# EAGLE board client (EAGLE 9.0.1)
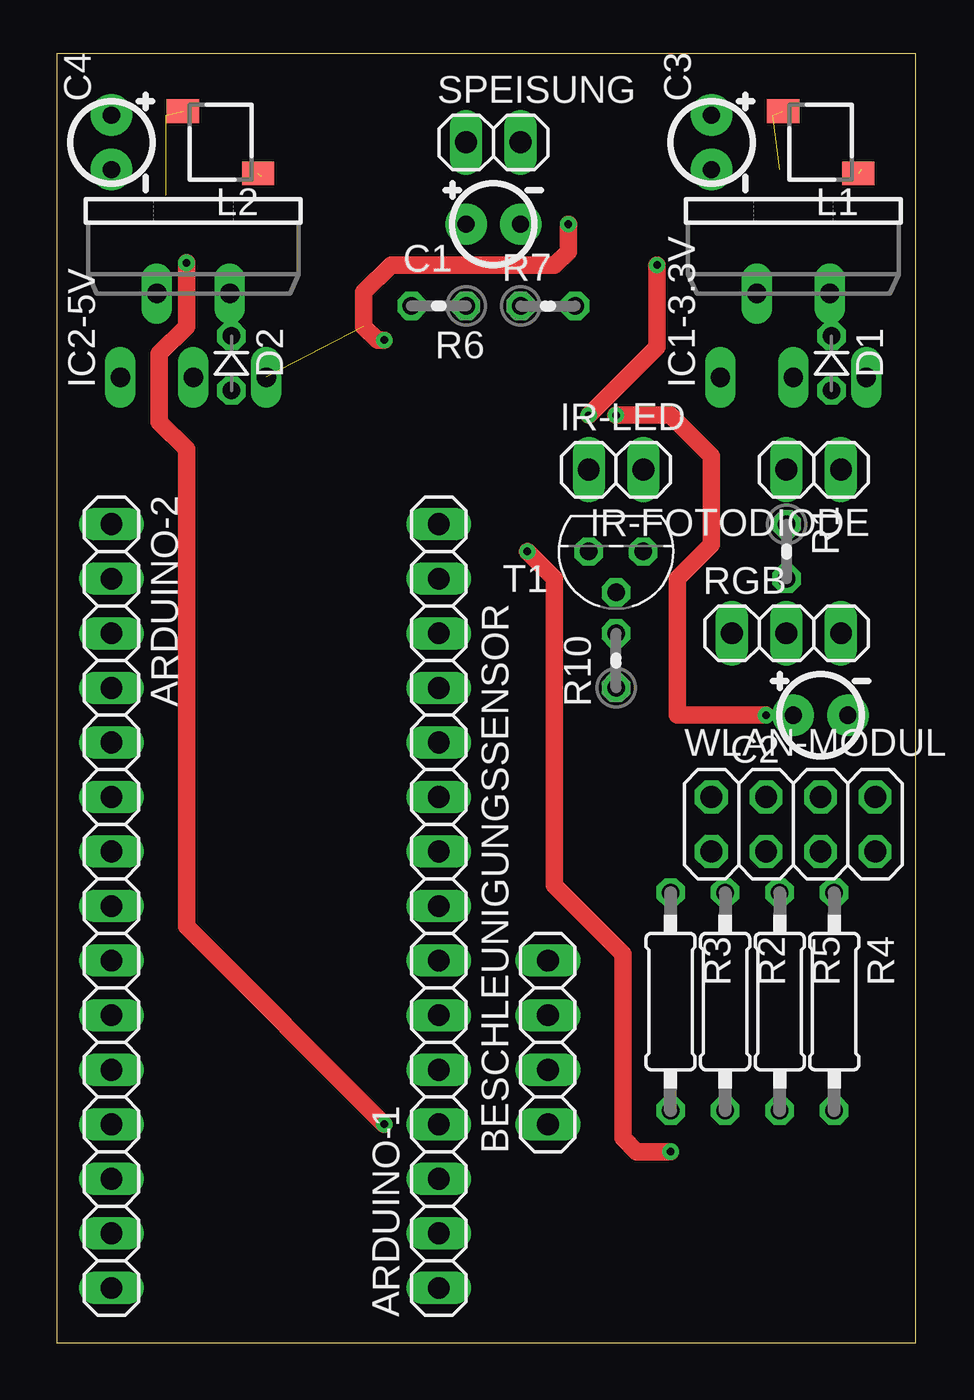
[diagram p0: board, top side]
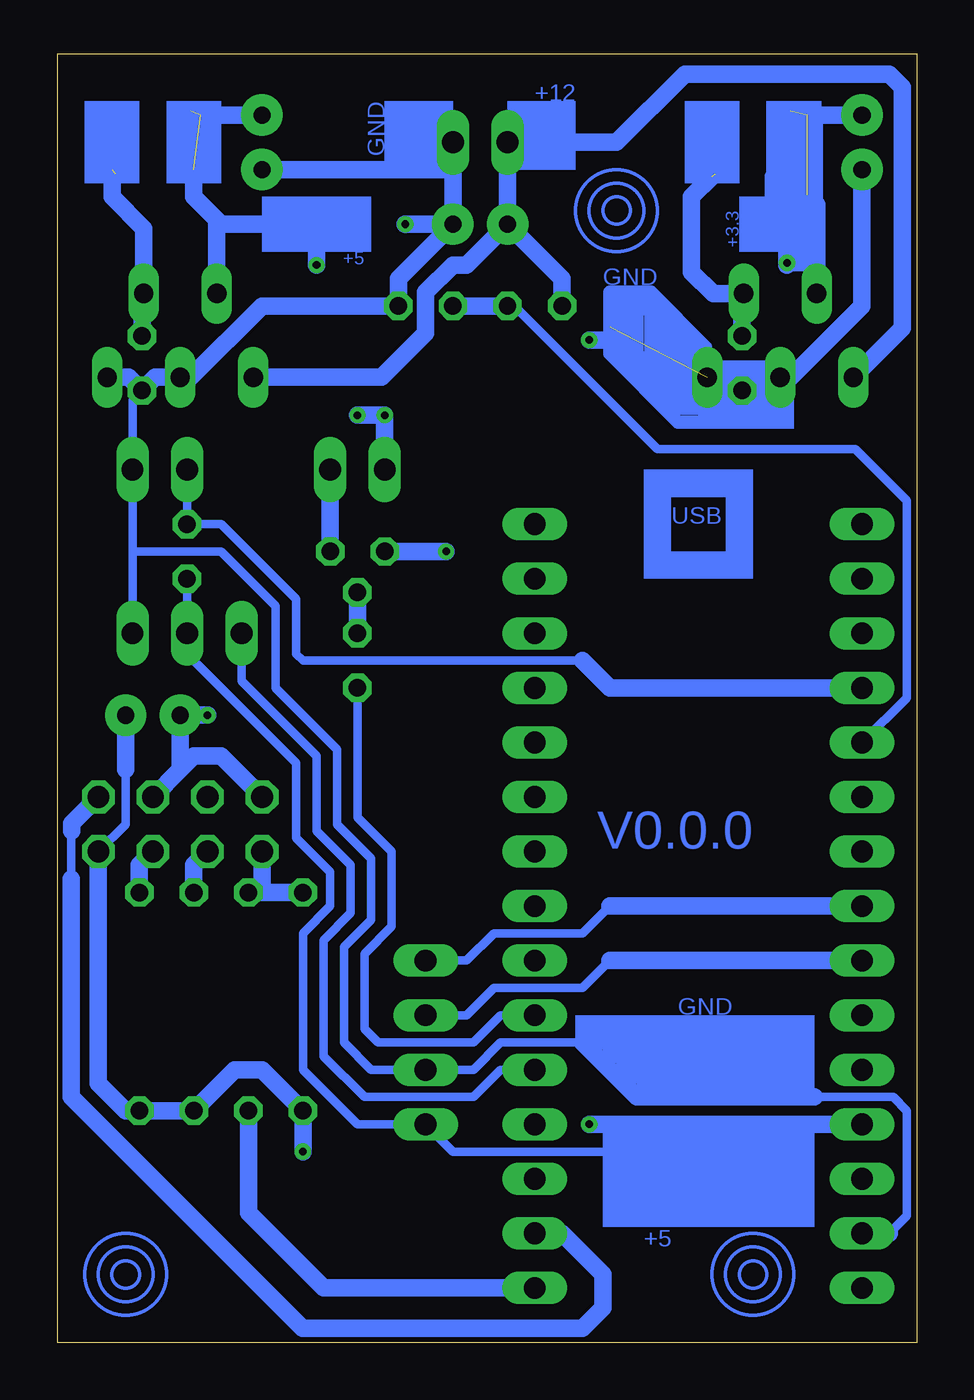
[diagram p1: board, bottom side, seen from below]

Size 40 x 60.01 mm. Coordinates in mm from the lower left corner, seen from the top.
Outline: 0,60 40,60 40,0 0,0 0,60.01
Copper layers (1*16): Top 0.035mm / dielectric 1.5mm / Bottom 0.035mm
Design rules "default *": minimum track width 6mil, minimum drill 0.35mm, track to track 6mil, track to pad 6mil, pad to pad 6mil, via to via 6mil, smd to smd 6mil, copper to edge 10mil, drill to drill 6mil, minimum pad ring 10mil, minimum via ring 8mil, stop-mask expansion 4mil, vias tented up to drill 0mil, thermal gap 10mil

## Footprints (pad centres in the part's own frame; a part is rotated, then mirrored left to right if it is on the bottom)
1X15 = drill 1.016 long: 1 -17.78,0; 2 -15.24,0; 3 -12.7,0; 4 -10.16,0; 5 -7.62,0; 6 -5.08,0; 7 -2.54,0; 8 0,0; 9 2.54,0; 10 5.08,0; 11 7.62,0; 12 10.16,0; 13 12.7,0; 14 15.24,0; 15 17.78,0
1X04 = drill 1.016 long: 1 -3.81,0; 2 -1.27,0; 3 1.27,0; 4 3.81,0
KONDENSATOR_ELEKTROLYT = drill 0.8 pad 1.93: P$1 -1.27,0; P$2 1.27,0
D-2.5 = drill 0.813 octagon: A 1.27,0; C -1.27,0
TO220-51 = drill 0.9 long: 1 -3.4,-8.4; 2 -1.7,-4.5; 3 0,-8.4; 4 1.7,-4.5; 5 3.4,-8.4
1X02 = drill 1.016 long: 1 -1.27,0; 2 1.27,0
SM-L15A = smd 1.1 x 1.5: 1 -1.45,-1.75; 2 1.45,1.75
0204V = drill 0.813 octagon: 1 -1.27,0; 2 1.27,0
0207/10 = drill 0.813 octagon: 1 -5.08,0; 2 5.08,0
1X03 = drill 1.016 long: 1 -2.54,0; 2 0,0; 3 2.54,0
TO92 = drill 0.813 octagon: 1 1.27,0; 2 0,1.905; 3 -1.27,0
2X04 = drill 1.016 octagon: 1 -3.81,-1.27; 2 -3.81,1.27; 3 -1.27,-1.27; 4 -1.27,1.27; 5 1.27,-1.27; 6 1.27,1.27; 7 3.81,-1.27; 8 3.81,1.27

## Placement (x,y rotation side)
ARDUINO-1  [1X15]  17.78,20.32 90 top
ARDUINO-2  [1X15]  2.54,20.32 270 top
BESCHLEUNIGUNGSSENSOR  [1X04]  22.86,13.97 90 top
C1  100µF  [KONDENSATOR_ELEKTROLYT]  20.32,52.07 180 top
C2  10µF  [KONDENSATOR_ELEKTROLYT]  35.56,29.21 180 top
C3  100µF  [KONDENSATOR_ELEKTROLYT]  30.48,55.88 90 top
C4  100µF  [KONDENSATOR_ELEKTROLYT]  2.54,55.88 90 top
D1  [D-2.5]  36.07,45.59 270 top
D2  [D-2.5]  8.13,45.59 270 top
IC1-3.3V  [TO220-51]  34.29,53.34 0 top
IC2-5V  [TO220-51]  6.35,53.34 0 top
IR-FOTODIODE  [1X02]  35.24,40.64 180 top
IR-LED  [1X02]  26.04,40.64 0 top
L1  100µH  [SM-L15A]  35.56,55.88 90 top
L2  100µH  [SM-L15A]  7.62,55.88 90 top
R1  200k  [0204V]  33.97,36.83 270 top
R2  1.8k  [0207/10]  31.11,15.88 270 top
R3  3.3k  [0207/10]  28.57,15.88 270 top
R4  100k  [0207/10]  36.2,15.88 270 top
R5  100k  [0207/10]  33.66,15.88 270 top
R6  680k  [0204V]  17.78,48.26 180 top
R7  470k  [0204V]  22.86,48.26 0 top
R10  5.1k  [0204V]  26.04,31.75 90 top
RGB  [1X03]  33.97,33.02 0 top
SPEISUNG  [1X02]  20.32,55.88 0 top
T1  BC337  [TO92]  26.04,36.83 180 top
WLAN-MODUL  [2X04]  34.29,24.13 0 top

## Library data of the parts
ARDUINO-1 ARDUINO-2 BESCHLEUNIGUNGSSENSOR IR-FOTODIODE IR-LED RGB SPEISUNG WLAN-MODUL = pinhead
C1-C4 = 0_TEC-1.IPA Sven
D1 D2 = diode
IC1-3.3V IC2-5V = linear
L1 L2 = inductor-neosid; OC_FARNELL: unknown; OC_NEWARK: unknown
R1 R6 R7 = rcl; SPICEPREFIX: R
R2-R5 = rcl
R10 = resistor
T1 = transistor

## Nets
N$1: D1.C IC1-3.3V.4 L1.1
N$3: C1.P$2 IC1-3.3V.1 IC2-5V.1 R6.2 SPEISUNG.1
N$4: ARDUINO-2.14 BESCHLEUNIGUNGSSENSOR.2 C1.P$1 C3.P$1 C4.P$1 D1.A D2.A IC1-3.3V.3 IC1-3.3V.5 IC2-5V.3 IC2-5V.5 IR-FOTODIODE.1 R7.2 RGB.3 SPEISUNG.2
N$5: D2.C IC2-5V.4 L2.1
N$7: ARDUINO-2.5 R6.1 R7.1
N$8: C2.P$2 C3.P$2 IC1-3.3V.2 IR-LED.1 L1.2 WLAN-MODUL.2 WLAN-MODUL.6
N$10: C2.P$1 R3.2 R4.2 R5.2 T1.1 WLAN-MODUL.7
N$11: R2.1 R3.1 WLAN-MODUL.1
N$12: R5.1 WLAN-MODUL.3
N$13: R4.1 WLAN-MODUL.5
N$14: ARDUINO-1.1 R2.2
N$15: ARDUINO-1.2 WLAN-MODUL.8
N$16: IR-LED.2 T1.3
N$17: ARDUINO-1.5 RGB.1
N$18: R10.2 T1.2
N$19: ARDUINO-1.6 R10.1
N$20: ARDUINO-2.9 BESCHLEUNIGUNGSSENSOR.3
N$21: ARDUINO-2.8 BESCHLEUNIGUNGSSENSOR.4
N$22: ARDUINO-2.4 IR-FOTODIODE.2 R1.1
N$23: ARDUINO-2.12 BESCHLEUNIGUNGSSENSOR.1 C4.P$2 IC2-5V.2 L2.2 R1.2 RGB.2

## Tracks (layer width: path | path; a pad name or v marks a point on that pad's centre or on a via)
N$1  (1 unrouted)
  Bottom 0.813: 37.47,54.61 37.47,53.34 35.99,51.87 IC1-3.3V.4 36.07,48.76 D1.C
N$3
  Bottom 0.813: C1.P$2 SPEISUNG.1 13.97,55.88 10.79,59.05 1.27,59.05 0.66,58.45 0.66,47.23 IC2-5V.1 | R6.2 16.51,49.53 C1.P$2 | IC1-3.3V.1 24.91,44.94 22.86,46.99 22.86,48.9 21.59,50.16 20.95,50.16 C1.P$2
N$4  (via drill 0.35)  (1 unrouted)
  Top 0.813: v23.81,52.07 23.81,50.8 23.18,50.16 15.56,50.16 14.29,48.9 14.29,47.31 14.92,46.67 v15.24,46.67
  Bottom 0.406: 1.27,5.08 0.46,5.89 0.46,10.79 1.09,11.43 4.76,11.43 | D1.A 36.51,43.88 IR-FOTODIODE.1 36.51,36.83 | RGB.3 36.51,36.83 | 36.51,36.83 32.38,36.83 29.84,34.29 29.84,30.48 26.99,27.62 26.99,24.13 25.4,22.54 25.4,19.68 26.67,18.41 26.67,13.97 25.4,12.7 BESCHLEUNIGUNGSSENSOR.2 20.64,12.7 19.37,13.97 15.56,13.97
  Bottom 0.813: SPEISUNG.2 21.59,54.61 | 21.59,54.61 C1.P$1 | C1.P$1 24.13,49.53 R7.2 30.48,48.26 33.8,44.94 IC1-3.3V.3 35.45,44.94 D1.A 36.69,44.94 IC1-3.3V.5 | C3.P$1 21.59,54.61 | C4.P$1 2.54,48.26 5.86,44.94 IC2-5V.3 7.51,44.94 D2.A 8.74,44.94 IC2-5V.5 | ARDUINO-2.14 1.27,5.08 | 4.76,11.43 13.02,11.43 15.56,13.97 | C1.P$1 v23.81,52.07 | v15.24,46.67 13.97,46.67
N$5  (1 unrouted)
  Bottom 0.813: D2.C 8.13,48.76 IC2-5V.4 9.47,48.84 10.48,49.85 10.48,53.34 9.53,54.29
N$6
  Bottom 0.635: 9.84,42.86 11.11,42.86 14.29,46.04 14.29,48.9 12.38,48.9 9.84,46.35 9.84,43.5 11.11,43.5 13.65,46.04 13.65,48.58 12.38,48.58 10.16,46.35 10.16,43.81 10.79,43.81 13.02,46.04 13.02,48.26 12.7,48.26 12.38,47.94 | 12.38,47.94 10.79,46.35 10.79,44.45 | 10.79,44.13 10.79,44.45 | 10.79,44.45 12.38,46.04 12.38,46.67 | 12.38,47.94 12.38,46.67 | 12.38,46.67 11.11,45.4 11.11,46.04 12.06,46.99
N$7
  Bottom 0.406: ARDUINO-2.5 0.46,30.02 0.46,39.2 2.86,41.59 12.06,41.59 18.73,48.26 R6.1
  Bottom 0.813: R7.1 R6.1
N$8  (via drill 0.35)  (2 unrouted)
  Top 0.813: v27.94,50.16 27.94,46.35 v24.77,43.18 | v33.02,29.21 28.89,29.21 28.89,35.56 30.48,37.15 30.48,41.27 28.57,43.18 v26.04,43.18
  Bottom 0.813: WLAN-MODUL.2 32.38,27.3 33.66,27.3 34.29,26.67 | 34.29,26.67 WLAN-MODUL.6 | 34.29,26.67 C2.P$2 v33.02,29.21 | IC1-3.3V.2 32.59,52.27 | 32.59,52.27 33.66,53.34 33.66,54.61 | 32.59,52.27 32.38,52.07 27.94,52.07 v27.94,50.16 | C3.P$2 33.34,57.15 | IR-LED.1 v24.77,43.18 v26.04,43.18
N$9
  Bottom 0.813: 5.08,53.34 5.08,54.61
N$10  (via drill 0.35)
  Top 0.813: v28.57,8.89 26.99,8.89 26.35,9.53 26.35,18.1 23.18,21.27 23.18,35.56 v21.91,36.83
  Bottom 0.406: WLAN-MODUL.7 36.83,24.13 36.83,26.67
  Bottom 0.813: WLAN-MODUL.7 38.1,12.06 36.83,10.79 R4.2 R5.2 31.75,12.7 30.48,12.7 R3.2 v28.57,8.89 | 36.83,26.67 C2.P$1 | v21.91,36.83 T1.1
N$11
  Bottom 0.813: R2.1 30.48,20.95 | 30.48,20.95 R3.1 | WLAN-MODUL.1 30.48,20.95
N$12
  Bottom 0.813: WLAN-MODUL.3 33.66,22.23 R5.1
N$13
  Bottom 0.813: WLAN-MODUL.5 36.2,22.23 R4.1
N$14
  Bottom 0.813: ARDUINO-1.1 27.62,2.54 31.11,6.03 R2.2
N$15
  Bottom 0.406: 39.34,23.81 39.37,23.78 39.37,21.59
  Bottom 0.813: 39.34,23.81 39.34,24.16 WLAN-MODUL.8 | 39.37,21.59 39.37,11.43 28.6,0.66 15.56,0.66 14.61,1.61 14.61,3.17 16.51,5.08 ARDUINO-1.2
N$16
  Bottom 0.813: IR-LED.2 T1.3
N$17
  Bottom 0.406: 31.43,31.75 RGB.1 31.43,30.8 27.94,27.3 27.94,23.81 26.35,22.23 26.35,20 27.62,18.73 27.62,13.34 25.72,11.43 20.64,11.43 19.37,12.7 ARDUINO-1.5
N$18
  Bottom 0.813: R10.2 T1.2
N$19
  Bottom 0.406: ARDUINO-1.6 19.37,15.24 20.64,13.97 25.08,13.97 25.72,14.61 25.72,18.1 24.45,19.37 24.45,22.86 26.04,24.45 R10.1
N$20
  Bottom 0.406: 14.29,17.78 15.56,16.51 19.68,16.51 20.95,15.24 BESCHLEUNIGUNGSSENSOR.3
  Bottom 0.813: ARDUINO-2.9 14.29,17.78
N$21
  Bottom 0.406: 14.29,20.32 15.56,19.05 19.68,19.05 20.95,17.78 BESCHLEUNIGUNGSSENSOR.4
  Bottom 0.813: ARDUINO-2.8 14.29,20.32
N$22
  Bottom 0.406: IR-FOTODIODE.2 R1.1 32.38,38.1 28.89,34.61 28.89,32.07 28.57,31.75 15.56,31.75
  Bottom 0.813: ARDUINO-2.4 14.29,30.48 15.56,31.75
N$23  (via drill 0.35)  (2 unrouted)
  Top 0.813: v15.24,10.16 6.03,19.37 6.03,41.59 4.76,42.86 4.76,46.04 6.03,47.31 v6.03,50.27
  Bottom 0.406: 33.97,32.7 RGB.2 | RGB.2 R1.2 | 14.29,10.16 14.29,8.89 21.59,8.89 BESCHLEUNIGUNGSSENSOR.1 26.04,10.16 28.57,12.7 28.57,19.05 27.3,20.32 27.3,21.91 28.89,23.5 28.89,26.99 33.97,32.07 RGB.2
  Bottom 0.813: C4.P$2 5.08,57.15 | IC2-5V.2 4.65,50.16 | 4.65,50.16 4.65,52.99 5.08,53.42 | ARDUINO-2.12 14.29,10.16 v15.24,10.16 | v6.03,50.27 4.75,50.27 4.65,50.16
N$24
  Bottom 0.813: 4.76,50.8 6.03,50.8 6.03,50.16
N$25
  Bottom 0.813: 6.67,54.29 6.67,53.34 5.4,53.34 5.71,53.66 6.03,53.66
N$26
  Bottom 0.813: 4.76,53.34 4.76,54.29 4.76,56.83
(copper drawn outside any net)
  shapes: Bottom area x19, Bottom circle x9

## Text on the board
Bottom: +12 | GND | +3.3 | +5 | GND | USB | V0.0.0 | GND | +5